# Altium PCB YL203纯密码板2084.PcbDoc
Units mil, origin at the board's own origin, x right, y up, seen from the top; angles counter-clockwise.
Board outline 2775 x 2250 mil, 2 copper layers (Top Layer, Bottom Layer); 85 components, 67 nets, 269 pads, 213 vias.
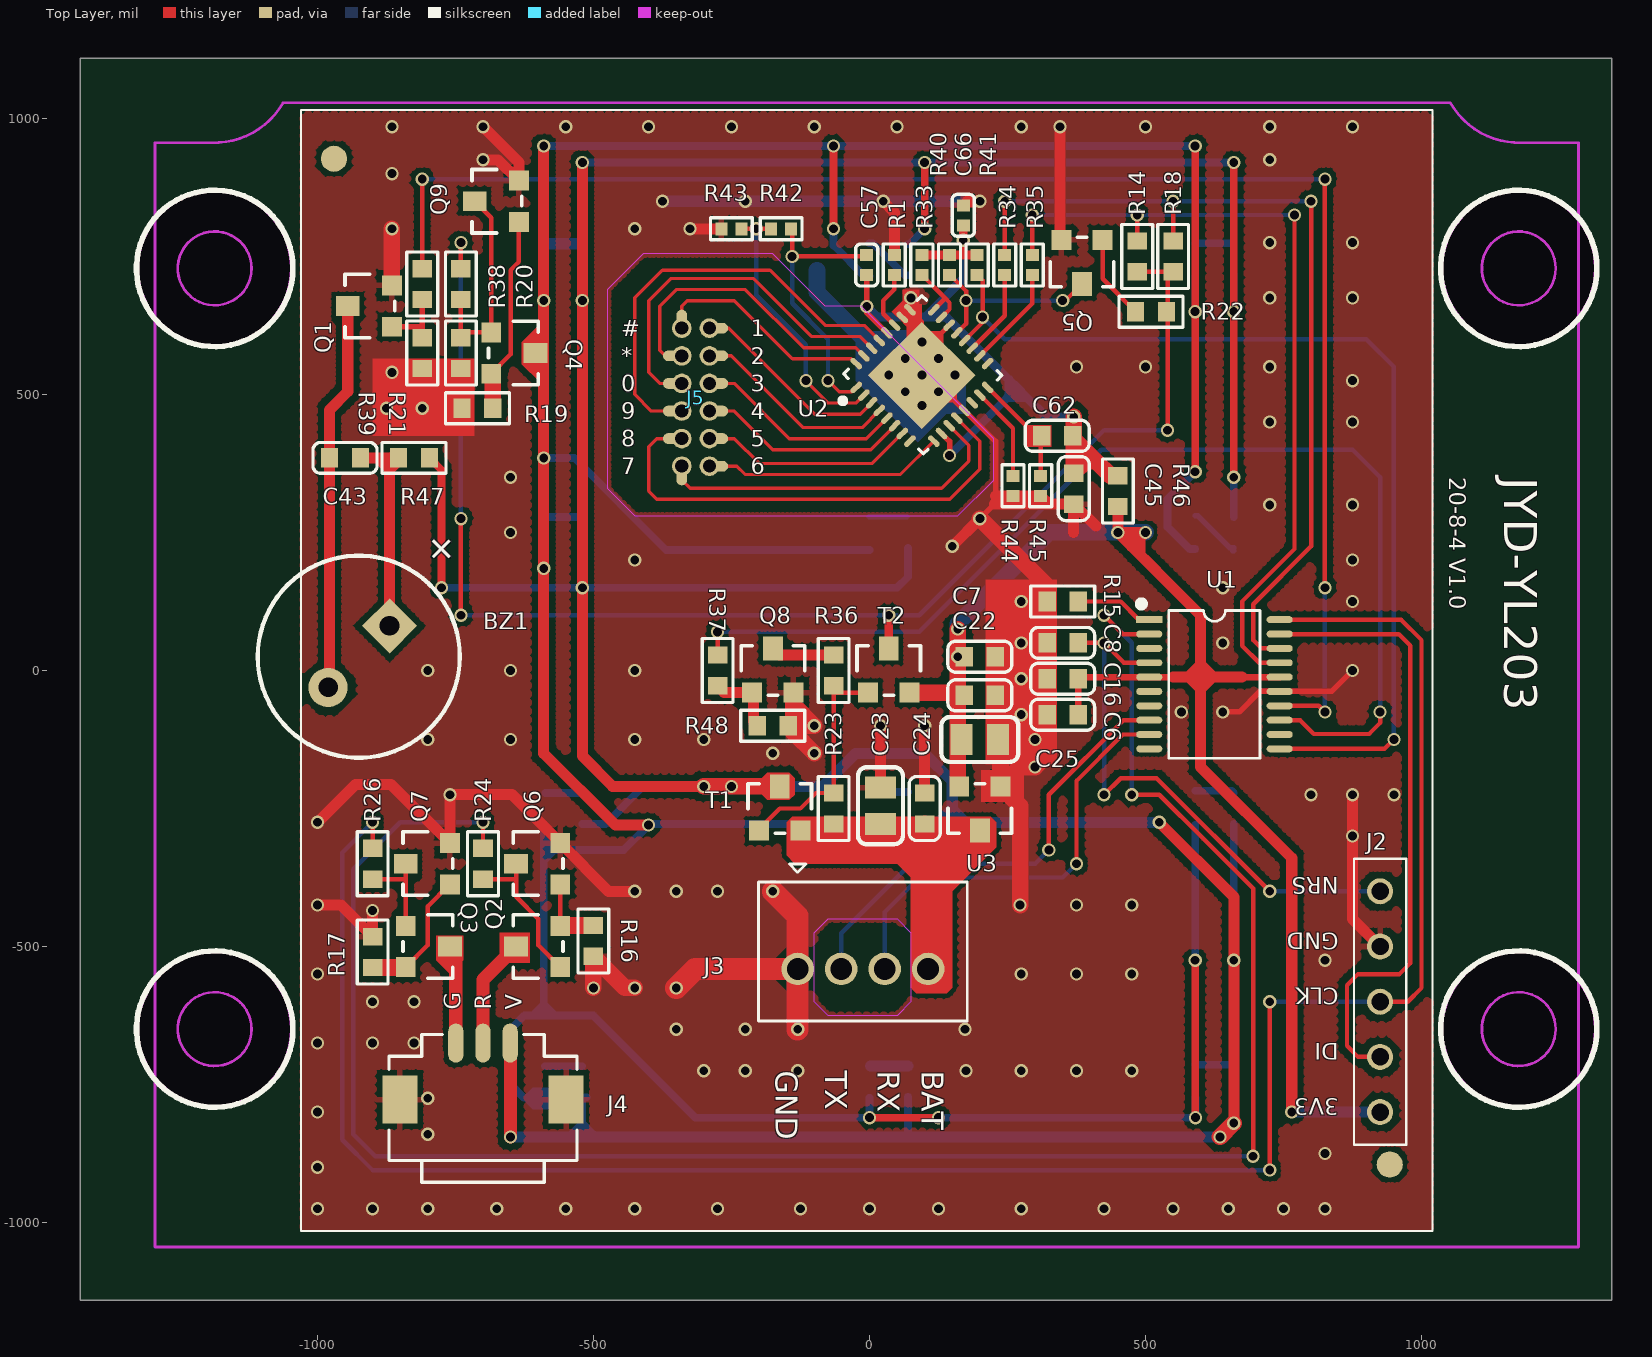
[diagram p0: Top Layer view]
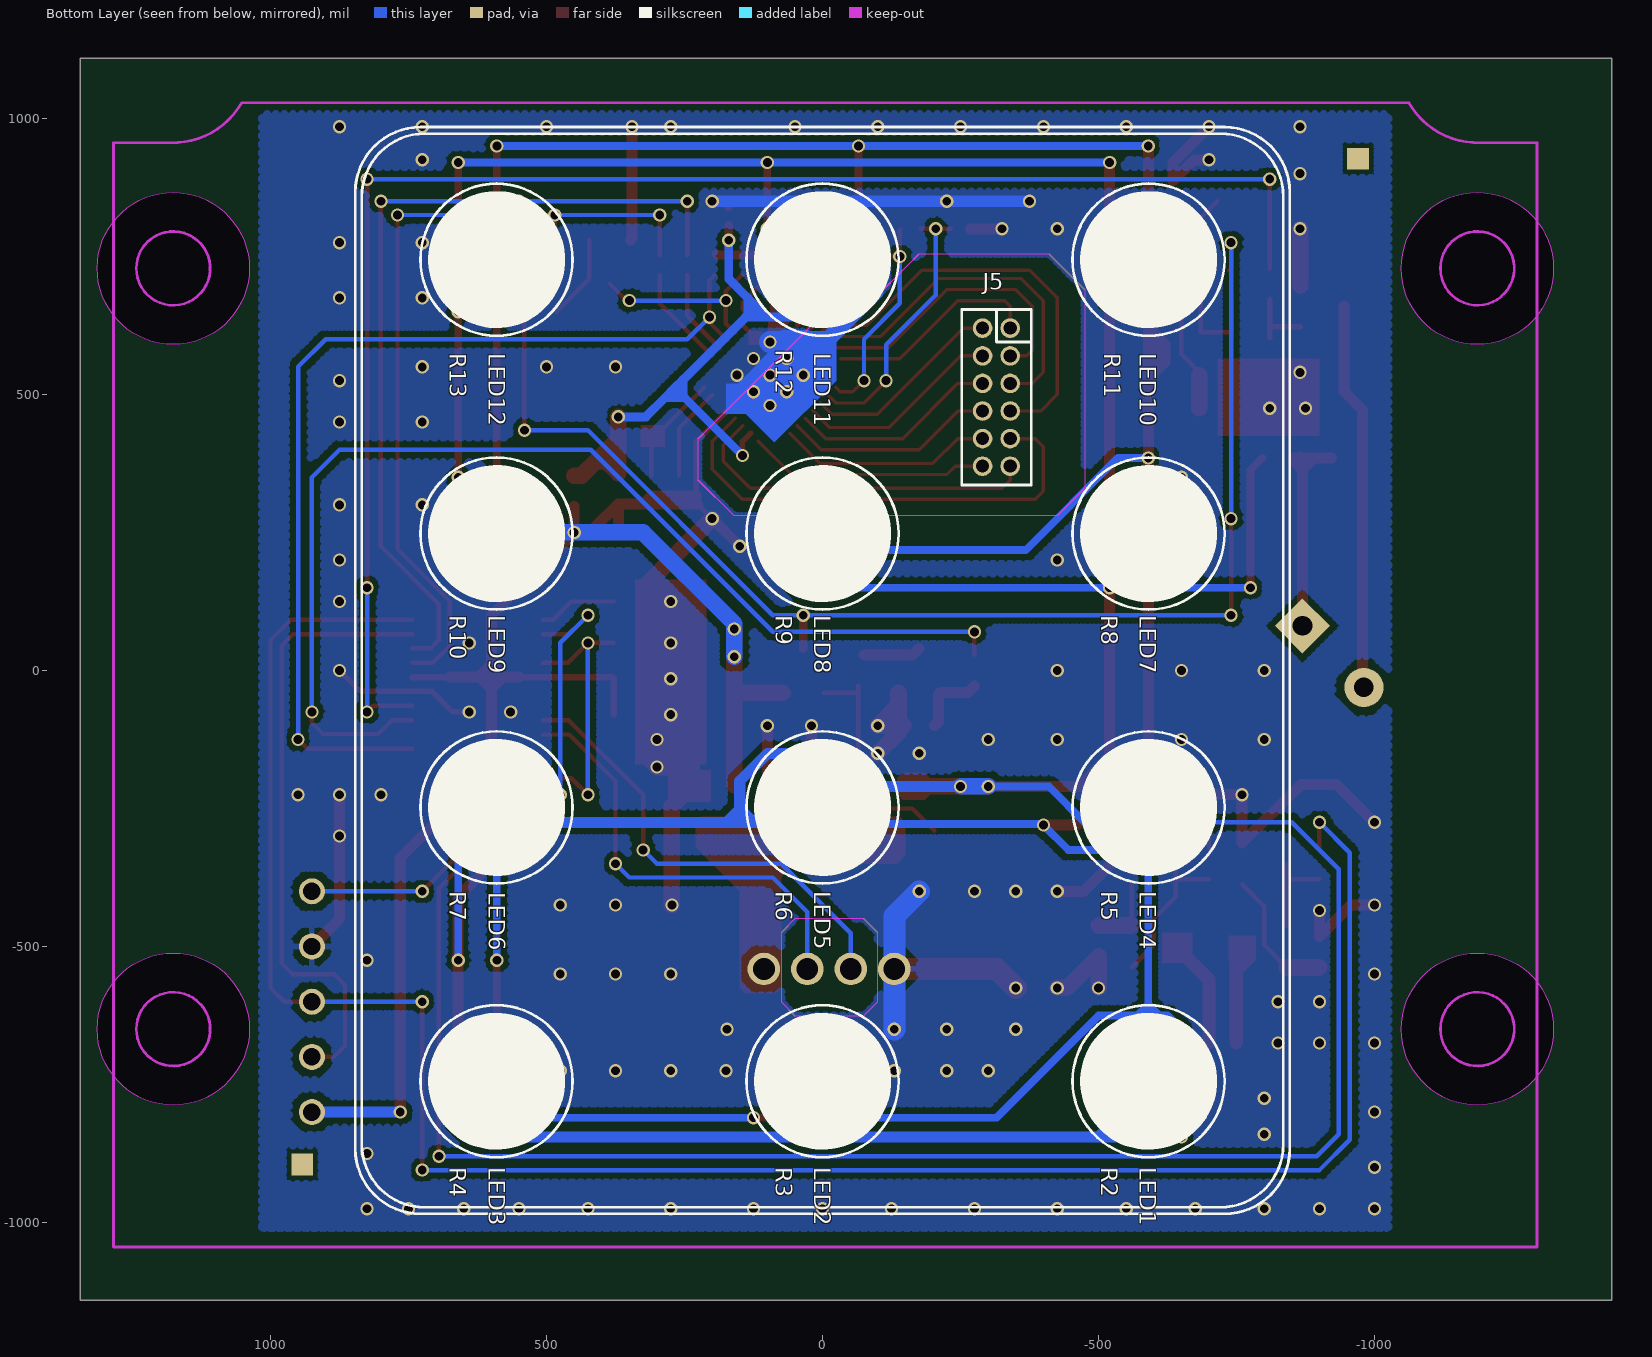
[diagram p1: Bottom Layer view, seen from below]
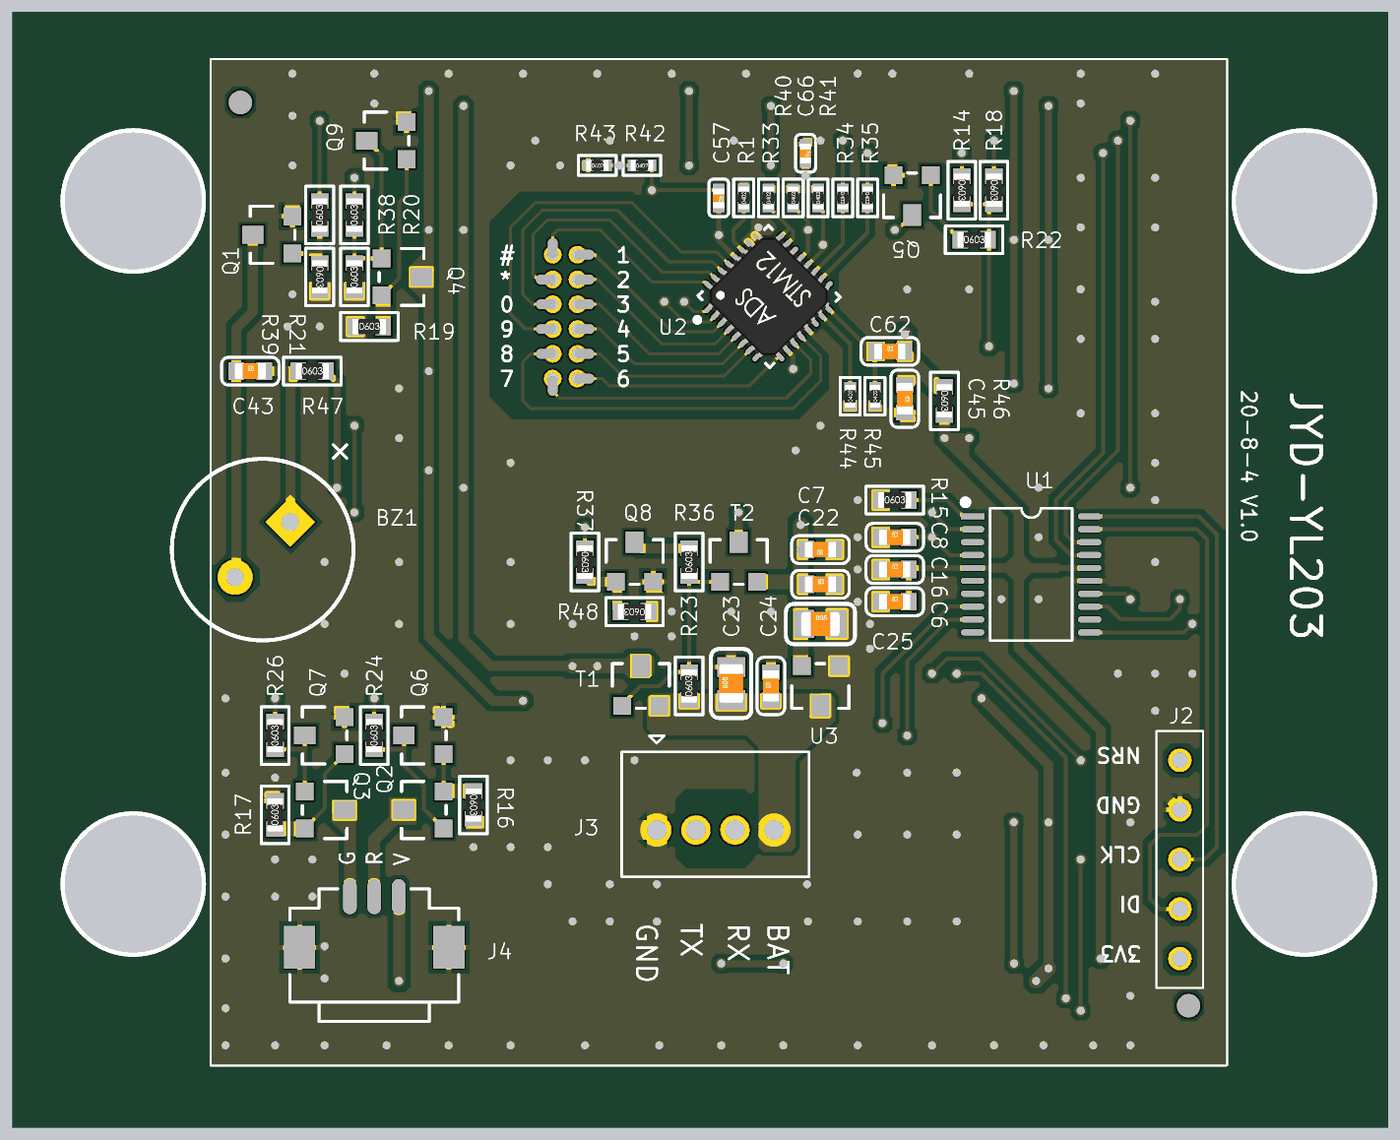
[diagram p2: 3D render of the assembled board from above, using the file's embedded part models]
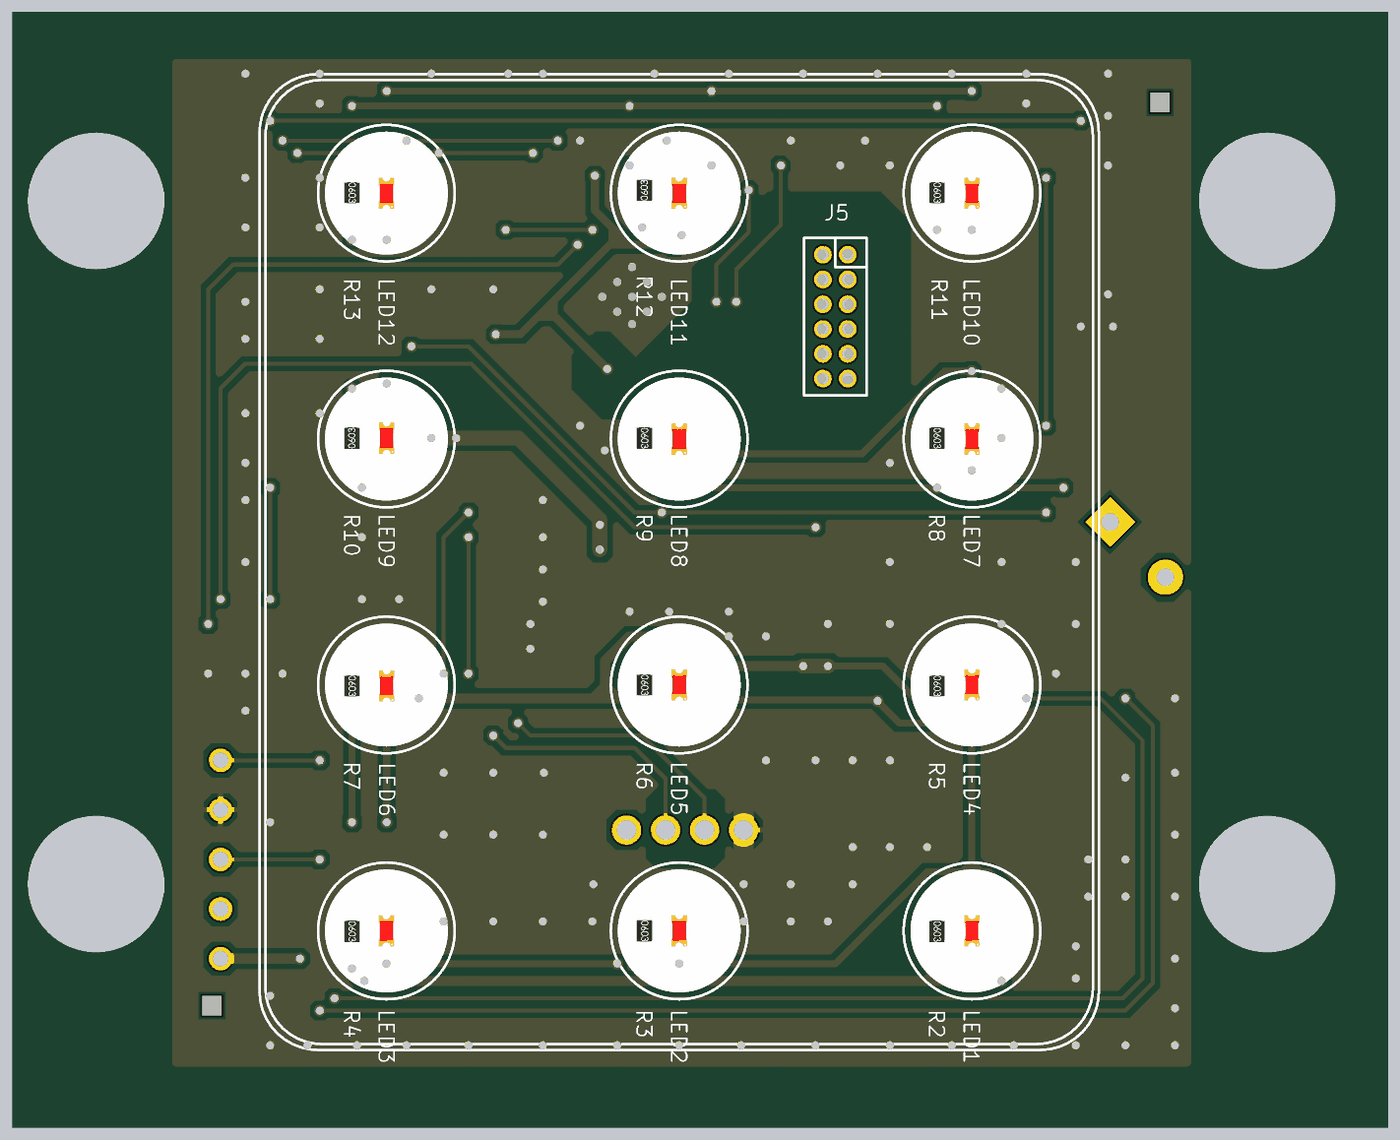
[diagram p3: 3D render of the assembled board from below, using the file's embedded part models]

## Layer stack, top to bottom
Top Layer: signal copper 1.4
Dielectric: dielectric 12.6, FR-4, Dk 4.8
Bottom Layer: signal copper 1.4

## Board outline
-1429.96,1109.41 1345.04,1109.41 1345.04,-1140.59 -1429.96,-1140.59 -1429.96,1109.41
cut-out: -1186.06,866.14 ccw(c-1186.06,728.35) -1323.86,728.35 ccw(c-1186.06,728.35) -1186.06,590.55 ccw(c-1186.06,728.35) -1048.27,728.35 ccw(c-1186.06,728.35)
cut-out: 1176.14,866.14 ccw(c1176.14,728.35) 1038.35,728.35 ccw(c1176.14,728.35) 1176.14,590.55 ccw(c1176.14,728.35) 1313.94,728.35 ccw(c1176.14,728.35)
cut-out: 1176.14,-511.81 ccw(c1176.14,-649.61) 1038.35,-649.61 ccw(c1176.14,-649.61) 1176.14,-787.4 ccw(c1176.14,-649.61) 1313.94,-649.61 ccw(c1176.14,-649.61)
cut-out: -1186.06,-511.81 ccw(c-1186.06,-649.61) -1323.86,-649.61 ccw(c-1186.06,-649.61) -1186.06,-787.4 ccw(c-1186.06,-649.61) -1048.27,-649.61 ccw(c-1186.06,-649.61)

## Design rules (kind name [scope] priority, off if disabled: settings)
Clearance Clearance_1 [(IsWire)or(IsThruPin)or(IsFill)or(InPolygon)or(IsKeepOut) vs (IsWire)or(IsThruPin)or(IsFill)or(InPolygon)or(IsKeepOut)] p1 off: gap=11
Clearance [All] p2: gap=7.87
ComponentClearance [All] p1: gap=0 collisioncheckmode=3 verticalgap=0 showdistances=FALSE
HoleSize [All] p1: absolutevalues=TRUE maxlimit=393.7 minlimit=1 maxpercent=80.000 minpercent=20.000
HoleToHoleClearance [All] p1: gap=0 allowstackedmicrovias=TRUE
MinimumSolderMaskSliver [All] p1: minsoldermaskwidth=0
PolygonConnect PolygonConnect_1 [IsVia] p1: connectstyle=Direct reliefconductorwidth=10 reliefentries=4 polygonreliefangle="90 Angle" airgapwidth=10
PolygonConnect [All] p2: connectstyle=Relief reliefconductorwidth=10 reliefentries=4 polygonreliefangle="90 Angle" airgapwidth=10
RoutingVias [All] p1: holewidth=28 width=50 viastyle="Through Hole" minholewidth=6 minwidth=8 maxholewidth=27.99 maxwidth=27.99
SilkToSilkClearance [All] p1: silktosilkclearance=0
SilkToSolderMaskClearance SilkscreenOverComponentPads [IsPad] p1: minsilkscreentomaskgap=0 clearancetoexposedcopper=TRUE
SolderMaskExpansion [All] p1: expansion=4
Width [All] p1: maxlimit=80 minlimit=3 preferedwidth=10
22 further rules are at their usual default settings.

## Components (designator, comment, footprint, x,y, rotation, side; value= is the part's Value field where it differs from the comment)
BZ1 "BUZZER" BUZZER_D93_L40 -925,25 r225 top
C6 "1uF/6.3V" LC-0603_C 350,-80 r0 top
C7 "100nF" LC-0603_C 200,25 r180 top
C8 "100nF" LC-0603_C 350,50 r0 top
C16 "1uF/6.3V" LC-0603_C 350,-15 r0 top
C22 "100nF" LC-0603_C 200,-45 r0 top
C23 "22uF/10V" LC-0805_C 20,-245 r90 top
C24 "100nF" LC-0603_C 100,-250 r90 top
C25 "10uF/10V" LC-0805_C 200,-125 r0 top
C43 "10uF/10V" LC-0603_C -950,385 r0 top
C45 "1uF" LC-0603_C 370.04,329.41 r270 top
C57 "820P 1%" LC-0402_C -4.96,734.41 r270 top
C62 "0.1uF" LC-0603_C 340,425 r0 top
C66 "0.1uF" LC-0402_C 170.04,824.41 r270 top
J2 "2.54mm烧录口" 5P-2.54mm 925,-800 r90 top
J3 "后板串口" 4P-2.0XX -129.96,-540.59 r0 top
J4 "S3B-PH-KL" 3P-1.25mm-SMT -700,-675 r0 top
J5 "Header 12H" 6P*2*1.27MM_1 -314.96,495 r270 bottom
LED1 "LED" 0603LED -590.55,-744.09 r270 bottom
LED2 "LED" 0603LED 0,-744.09 r270 bottom
LED3 "LED" 0603LED 590.55,-744.09 r270 bottom
LED4 "LED" 0603LED -590.55,-248.03 r270 bottom
LED5 "LED" 0603LED 0,-248.03 r270 bottom
LED6 "LED" 0603LED 590,-250 r270 bottom
LED7 "LED" 0603LED -590.55,248.03 r270 bottom
LED8 "LED" 0603LED 0,248.03 r270 bottom
LED9 "LED" 0603LED 590,250 r270 bottom
LED10 "LED" 0603LED -590.55,744.09 r270 bottom
LED11 "LED" 0603LED 0,744.09 r270 bottom
LED12 "LED" 0603LED 590.55,744.09 r270 bottom
Q1 "SS8050" SOT-23-3L -905,660 r90 top (schematic designator T1)
Q2 "SS8050" SOT-23-3L -600,-500 r90 top (schematic designator T4)
Q3 "SS8050" SOT-23-3L -800,-500 r270 top (schematic designator T6)
Q4 "SS8050" SOT-23-3L -645,575 r270 top
Q5 "PMBT3904" SOT-23-3L 385,740 r180 top
Q6 "SS8050" SOT-23-3L -600,-350 r90 top
Q7 "SS8050" SOT-23-3L -800,-350 r90 top
Q8 "PMBT3904" SOT-23-3L -175,0 r0 top
Q9 "SS8050" SOT-23-3L -675,850 r90 top
R1 "2M1%" LC-0402_R 45.04,734.41 r90 top
R2 "100R" LC-0603_R -520,-745 r270 bottom
R3 "100R" LC-0603_R 70,-744.09 r270 bottom
R4 "100R" LC-0603_R 660,-745 r270 bottom
R5 "100R" LC-0603_R -520,-250 r270 bottom
R6 "100R" LC-0603_R 70,-248.03 r270 bottom
R7 "100R" LC-0603_R 660,-250 r270 bottom
R8 "100R" LC-0603_R -520,250 r270 bottom
R9 "100R" LC-0603_R 70,250 r270 bottom
R10 "100R" LC-0603_R 660,250 r90 bottom
R11 "100R" LC-0603_R -520,745 r270 bottom
R12 "100R" LC-0603_R 70,750 r90 bottom
R13 "100R" LC-0603_R 660,745 r270 bottom
R14 "10K" LC-0603_R 485,750 r270 top
R15 "10K" LC-0603_R 350,125 r0 top
R16 "33R" LC-0603_R -500,-490 r270 top
R17 "33R" LC-0603_R -900,-510 r90 top
R18 "10K" LC-0603_R 550,750 r270 top
R19 "33R" LC-0603_R -710,475 r0 top
R20 "1K" LC-0603_R -740,700 r90 top
R21 "10K" LC-0603_R -740,575 r90 top
R22 "10K" LC-0603_R 510,650 r0 top
R23 "100K" LC-0603_R -65,-250 r90 top
R24 "10K" LC-0603_R -700,-350 r90 top
R26 "10K" LC-0603_R -900,-350 r90 top
R33 "10K" LC-0402_R 95.04,734.41 r90 top
R34 "10R" LC-0402_R 245.04,734.41 r270 top
R35 "10R" LC-0402_R 295.04,734.41 r270 top
R36 "1K" LC-0603_R -65,0 r90 top
R37 "1K" LC-0603_R -275,0 r270 top
R38 "1K" LC-0603_R -810,700 r90 top
R39 "10K" LC-0603_R -810,575 r270 top
R40 "10K" LC-0402_R 145.04,734.41 r90 top
R41 "10K" LC-0402_R 195.04,734.41 r90 top
R42 "510K1%" LC-0402_R -160,800 r0 top
R43 "2M1%" LC-0402_R -250,800 r0 top
R44 "36K 1%" LC-0402_R 260.04,334.41 r90 top
R45 "330K" LC-0402_R 310.04,334.41 r90 top
R46 "0R-空" LC-0603_R 450,325 r270 top
R47 "2R2" LC-0603_R -825,385 r0 top
R48 "100K" LC-0603_R -175,-100 r180 top
T1 "SI2301" "SOT-23 - GDS" -162.4,-250 r0 top (schematic designator Q2)
T2 "SI2301" "SOT-23 - GDS" 35,0 r0 top (schematic designator Q1)
U1 "STM32F030F4P6" TSSOP-20-0.66 625,-25 r0 top
U2 "TSM12M" ADS_TMS12 95.04,534.41 r45 top
U3 "HT7533" SOT-23-3L 200,-250 r180 top

## Footprints (in the part's own frame and the unit in brackets; to place one, negate y for a bottom-side part, rotate by r counter-clockwise, add the part's x,y. Pads: shape width x height; smd on the part's side, far side on the other; paste and mask are expansions set on the pad)
3P-1.25mm-SMT [mm]
  oval 0.7x1.8 smd mask+0.05: 1(-1.25,0) 2(0,0) 3(1.25,0)
  rect 1.6x2.2 smd mask+0.05: 4(-3.825,-2.6) 5(3.825,-2.6)
  silkscreen extent -4.33,-6.4 4.33,0.4
4P-2.0XX [mm]
  round 1.5 hole 1: 1(0,0) 2(2,0) 3(4,0) 4(6,0)
  silkscreen extent -1.8,-2.4 7.8,4.83
5P-2.54mm [mm]
  round 1.2 hole 0.8: 1(0,0) 2(2.54,0) 3(5.08,0) 4(7.62,0) 5(10.16,0)
  silkscreen extent -1.5,-1.2 11.66,1.2
6P*2*1.27MM_1 [mm]
  oval 1x0.5 smd far side: 1(-3.527,0.635) 11(3.556,0.635)
  round 0.9 hole 0.6 paste+1: 1(-3.175,0.635)
  oval 0.5x1 smd far side: 2(-3.175,-1) 3(-1.905,1) 4(-1.905,-1) 5(-0.635,1) 6(-0.635,-1) 7(0.635,1) 8(0.635,-1) 9(1.905,1) 10(1.905,-1) 12(3.175,-1)
  round 0.9 hole 0.6 paste+0: 2(-3.175,-0.635) 3(-1.905,0.635) 4(-1.905,-0.635) 5(-0.635,0.635) 6(-0.635,-0.635) 7(0.635,0.635) 8(0.635,-0.635) 9(1.905,0.635) 10(1.905,-0.635) 11(3.175,0.635) 12(3.175,-0.635)
  silkscreen extent -4.04,-1.6 4.04,1.6
0603LED [mil]
  rect 34x34 smd: 1(-30,0) 2(30,0)
  silkscreen extent -60,-30 72,30, body extent -31,-16 31,16, height 24
ADS_TMS12 [mm]
  oval 0.65x0.25 smd: 1(-2.525,1.75) 2(-2.525,1.25) 3(-2.525,0.75) 4(-2.525,0.25) 5(-2.525,-0.25) 6(-2.525,-0.75) 7(-2.525,-1.25) 8(-2.525,-1.75) 17(2.525,-1.75) 18(2.525,-1.25) 19(2.525,-0.75) 20(2.525,-0.25) 21(2.525,0.25) 22(2.525,0.75) 23(2.525,1.25) 24(2.525,1.75)
  oval 0.25x0.65 smd: 9(-1.75,-2.525) 10(-1.25,-2.525) 11(-0.75,-2.525) 12(-0.25,-2.525) 13(0.25,-2.525) 14(0.75,-2.525) 15(1.25,-2.525) 16(1.75,-2.525) 25(1.75,2.525) 26(1.25,2.525) 27(0.75,2.525) 28(0.25,2.525) 29(-0.25,2.525) 30(-0.75,2.525) 31(-1.25,2.525) 32(-1.75,2.525)
  rect 3.5x3.5 smd: 33(0,0)
  silkscreen extent -3.52,-2.6 2.6,2.6, body extent -4.39,-4.41 4.46,4.44, height 0.9
BUZZER_D93_L40 [mm]
  rect 1.8x1.8 hole 0.9: 1(-2,0)
  round 1.8 hole 0.9: 2(2,0)
  silkscreen extent -4.65,-4.65 4.65,4.65
LC-0402_C [mm]
  rect 0.55x0.6 smd mask+0.051: 1(-0.457,0) 2(0.457,0)
  silkscreen extent -0.97,-0.51 0.97,0.51, body extent -0.48,-0.3 0.52,0.3, height 0.2
LC-0402_R [mm]
  rect 0.55x0.6 smd mask+0.051: 1(-0.457,0) 2(0.457,0)
  silkscreen extent -0.97,-0.51 0.97,0.51, body extent -0.57,-0.27 0.58,0.28, height 0.41
LC-0603_C [mm]
  rect 0.8x0.9 smd: 1(-0.711,0) 2(0.711,0)
  silkscreen extent -1.47,-0.71 1.47,0.71, body extent -0.8,-0.4 0.8,0.4, height 0.3
LC-0603_R [mm]
  rect 0.8x0.9 smd: 1(-0.711,0) 2(0.711,0)
  silkscreen extent -1.47,-0.71 1.47,0.71, body extent -0.85,-0.4 0.85,0.4, height 0.56
LC-0805_C [mil]
  rect 40x56 smd: 1(-33,0) 2(33,0)
  silkscreen extent -70,-41 70,41, body extent -39,-25 39,25, height 30
"SOT-23 - GDS" [mil]
  rect 36x43.31 smd: D(0,40)
  rect 36x36 smd: G(-37.4,-40) S(37.4,-40)
  silkscreen extent -57,-45 58,45
SOT-23-3L [mil]
  rect 36x36 smd: 1(-37.4,-40) 2(37.4,-40)
  rect 36x43.31 smd: 3(0,40)
  silkscreen extent -57,-45 58,45
TSSOP-20-0.66 [mm]
  rect 1.2x0.32 smd mask+0.051: 1(-3,2.972)
  oval 1.2x0.32 smd mask+0.051: 2(-3,2.311) 3(-3,1.651) 4(-3,0.991) 5(-3,0.33) 6(-3,-0.33) 7(-3,-0.991) 8(-3,-1.651) 9(-3,-2.311) 10(-3,-2.972) 11(3,-2.972) 12(3,-2.311) 13(3,-1.651) 14(3,-0.991) 15(3,-0.33) 16(3,0.33) 17(3,0.991) 18(3,1.651) 19(3,2.311) 20(3,2.972)
  silkscreen extent -3.51,-3.4 2.1,3.85

## Part data
BZ1: "Buzzer"
C6 C7 C8 C16: library part "CAP NP"
C22 C24: library part CAP-NP, "Capacitor, Ceramic"
C23 C25: library part CAP-P, "Capacitor, tolerance ±20%"
C43: library part C_0_Dup1
C45: library part C-C?, "Electrolytic Capacitor"
C57 C62 C66: library part CAP, "Capacitor"
J2: library part "Header 5", "Header, 5-Pin"
J3: library part "Header 4H", "Header, 4-Pin, Right Angle"
J4: library part "Header 3", "Header, 3-Pin"
J5: "Header, 12-Pin, Right Angle"
Q1 Q2 Q3 Q4 Q5 Q6 Q7 Q8 Q9: library part NPN_BJT, "Bipolar Junction Transistor"
R1 R22 R33 R40 R41 R42 R43 R44 R45: library part RES2
R2 R3 R4 R5 R6 R7 R8 R9 R10 R11 R12 R13 R14 R16 R17 R18 R19 R20 R21 R23 R36 R37 R47 R48: library part R
R15 R34 R35 R38 R39: library part R_Dup1
R24 R26: library part RES
R46: library part POWER-R
T1 T2: library part PWRMOSFET_EP_DGS_0
U1: library part Component_1
U3: library part XC6206P302M

## Free pads (board coordinates)
  round 39.37 hole 133.86: 1(-1186.06,-649.61) 2(-1186.06,728.35) 3(1176.14,-649.61) 4(1176.14,728.35)
  round 47.24 smd: MARK1(-970,927) MARK2(942.51,-895)
  rect 39.37x39.37 smd far side: MARK3(-970,927) MARK4(942.51,-895)

## Via types
v1: diameter 24, hole 16, Top Layer to Bottom Layer, tented both sides, 213 vias

## Nets (pads, with @x,y where several pads share a name; then routed paths per layer and width w, separated by ;. In a path a pad name is that pad's centre, name@x,y a point inside that pad or via, vN(x,y) a via of type N, cw(c..) or ccw(c..) an arc to the next point about the centre after c; other vN are vias at no path point)
BACKING_RED: R24.2 U1.2 | length 3660.9
  Top Layer w8: R24.2 v1(-700,-275) ; v1(425,100) 459,66 U1.2 ; v1(475,-225) 525,-225 605,-305 695,-395 v1(695,-880)
  Bottom Layer w8: v1(-700,-275) -850,-275 -935,-360 -935,-840 -895,-880 v1(695,-880) ; v1(425,100) 475,50 v1(475,-225)
BUZZER: R38.2 U1.14 | length 2848.4
  Top Layer w8: R38.2 v1(-810,890) ; U1.14 814,-64 v1(825,-75) ; v1(825,150) v1(825,890)
  Bottom Layer w8: v1(-810,890) v1(825,890) ; v1(825,-75) v1(825,150)
GND: C6.1 C7.1 C8.1 C16.1 C22.2 C23.2 C24.2 C25.2 C45.2 C66.1 J2.4 J3.1 J4.4 J4.5 Q1.2 Q5.2 Q6.2 Q7.2 Q8.2 Q9.2 R1.2 R15.1 R16.2 R17.2 R19.1 R21.1 R39.2 R43.1 R44.1 R45.1 R48.1 U1.15 U2.13 U2.22 U2.25 U2.26 U2.33 U3.1 | length 7373.8
  Top Layer w8: U2.26 U2.33@95.04,604.01 ; U2.25 95.04,631.85 U2.33@95.04,604.01 ; U2.33 U2.33@95.04,576.17 ; U2.22 U2.33@95.04,576.17 ; U2.33@95.04,576.17 U2.33@95.04,604.01
  Top Layer w10: U2.33 108.96,534.41 U2.13 228.53,414.84 228.53,316.41 228.53,303.53 226.41,301.41 v1(200,275) ; v1(640,-75) 670,-75 707,-38 U1.15 837,-38 v1(875,0)
  Top Layer w20: v1(-1000,-425) -957,-425 R17.2 v1(-900,-435) ; v1(-1000,-275) -931.28,-206.28 -866.32,-206.28 Q7.2 v1(-760,-225) -647.6,-225 Q6.2 -472.6,-400 v1(-425,-400) ; v1(-700,925) -672.6,925 Q9.2 -635,920 v1(-700,985) ; v1(-325,800) R43.1 ; C23.2 v1(20,-100) ; v1(25,850) 45.04,829.96 R1.2 ; C24.2 v1(100,-100) ; v1(150,225) v1(200,275) ; C66.1 177.63,850 v1(200,850) ; 226.41,301.41 325.04,301.41 ; 228.53,316.41 R44.1 R45.1 325.04,301.41 ; v1(345,985) 345,782.6 Q5.2 ; 370.04,250.04 C45.2 ; 410,261.45 C45.2 ; v1(875,-225) 875,-450 J2.4 ; 325.04,301.41 C45.2
  Top Layer w30: v1(-865,540) R39.2@-810,540 ; Q1.2 v1(-865,800) ; R39.2 R39.2@-810,540 ; R21.1 -740,477 R19.1 v1(-810,475) R39.2@-810,540 ; v1(-500,-575) R16.2 -443,-575 v1(-425,-575) ; R48.1 R48.1@-137.6,-100 ; Q8.2 -137.6,-62.4 ; v1(-100,-150) -137.6,-112.4 R48.1@-137.6,-100 ; v1(200,275) 322,153 R15.1 ; C22.2 C22.2@237.4,-45 ; C7.1 C7.1@237.4,25 ; C25.2 C25.2@237.4,-125 ; v1(272.9,-425) 272.9,-245.5 U3.1 ; v1(275,-80) C6.1 ; v1(300,-125) C25.2@237.4,-125 ; R48.1@-137.6,-100 -137.6,-62.4 ; R48.1@-137.6,-100 v1(-100,-100) -137.6,-62.4 ; U3.1 272.4,-175 v1(300,-175) 322,-153 C6.1 ; U3.1 C25.2@237.4,-125 ; C25.2@237.4,-125 C22.2@237.4,-45 ; C22.2@237.4,-45 245,-45 v1(275,-15) C16.1 ; C22.2@237.4,-45 C7.1@237.4,25 ; C7.1@237.4,25 250,25 v1(275,50) C8.1 ; C7.1@237.4,25 237.4,87.4 v1(275,125) R15.1 ; C6.1 C16.1 ; C16.1 C8.1 ; C8.1 R15.1
  Top Layer w40: v1(-350,-575) -315.59,-540.59 J3.1 ; v1(-175,-400) -129.96,-445.04 J3.1 ; v1(-129.96,-649.96) J3.1
  Bottom Layer w20: v1(-375,850) v1(-225,850) v1(25,850) v1(200,850)
  Bottom Layer w30: -95,725 -95,685 -5,595
  Bottom Layer w40: v1(-175,-400) -129.96,-445.04 J3.1 v1(-129.96,-649.96) v1@-130,-650 ; v1(35,535) 35,555 -5,595 v1(95,595)
  other v1: -1000,-975 -900,-975 -800,-975 -675,-975 -550,-975 -425,-975 -275,-975 -125,-975 0,-975 125,-975 275,-975 425,-975 550,-975 650,-975 750,-975 825,-975 -1000,-900 825,-875 -800,-840 -1000,-800 -800,-775 -300,-725 -225,-725 -130,-725 175,-725 275,-725 375,-725 475,-725 -1000,-675 -900,-675 -825,-675 -350,-650 -225,-650 173.02,-650 -900,-600 -825,-600 -1000,-550 275,-550 375,-550 475,-550 825,-525 375,-425 475,-425 -350,-400 -275,-400 875,-300 800,-225 950,-225 -175,-150 -800,-125 -650,-125 -425,-125 -300,-125 565,-75 -800,0 -650,0 -425,0 640,50 875,125 640,150 -425,200 875,200 -650,250 725,300 875,300 -650,350 725,450 875,450 -875,475 95,480 65,505 125,505 875,525 95,535 155,535 375,550 500,550 725,550 65,565 125,565 75,675 725,675 875,675 725,775 875,775 -425,800 -865,900 725,925 -865,985 -550,985 -400,985 -250,985 -100,985 50,985 275,985 500,985 725,985 875,985
GREEN_LL: J4.1 Q3.3 | length 179.5
  Top Layer w20: Q3.3 Q3.3@-749.21,-510.79
  Top Layer w24: J4.1 Q3.3@-749.21,-510.79
IRQ_TSM12: R41.1 U1.11 U2.20 | length 1807.6
  Top Layer w8: U2.20 205,630.45 v1(205,640) 205,706.45 R41.1 ; U1.11 933,-142 v1(950,-125)
  Bottom Layer w8: v1(205,640) 245,600 900,600 950,550 v1(950,-125)
KEY0: J5.5 U2.30 | length 656.6
  Top Layer w6: J5.5@-354.37,520 -380,520 -400,540 -400,670 -360,710 -210,710 -105,605 -17.31,605 U2.30
KEY1: J5.2 U2.3 | length 352.5
  Top Layer w6: J5.2@-275.63,620 -255,620 -99.41,464.41 -16.72,464.41 U2.3
KEY2: J5.4 U2.4 | length 360.1
  Top Layer w6: J5.4@-275.63,570 -250,570 -120,440 -13.29,440 U2.4
KEY3: J5.6 U2.5 | length 364.1
  Top Layer w6: J5.6@-275.63,520 -245,520 -145,420 -5.45,420 U2.5
KEY4: J5.8 U2.6 | length 368.2
  Top Layer w6: J5.8@-275.63,470 -245,470 -175,400 2.39,400 U2.6
KEY5: J5.10 U2.7 | length 376.3
  Top Layer w6: J5.10@-275.63,420 -245,420 -200,375 5.23,375 U2.7
KEY6: J5.12 U2.9 | length 423.5
  Top Layer w6: J5.12@-275.63,370 -240,370 -225,355 56.22,355 U2.9
KEY7: J5.11 U2.11 | length 635.3
  Top Layer w6: J5.11@-340,355 -340,345 -325,330 130.63,330 180.04,379.41 180.04,407.65 U2.11
KEY8: J5.9 U2.12 | length 870.6
  Top Layer w6: J5.9@-354.37,420 -385,420 -400,405 -400,325 -385,310 145.63,310 200.04,364.41 200.04,415.49 U2.12
KEY9: J5.7 U2.29 | length 774.3
  Top Layer w6: J5.7@-354.37,470 -395,470 -425,500 -425,675 -375,725 -180,725 -80,625 -9.47,625 U2.29
KEY#: J5.1 U2.32 | length 381.6
  Top Layer w6: J5.1@-340,633.86 -340,660 -330,670 -245,670 -139.41,564.41 U2.32@-32.4,564.41
KEY*: J5.3 U2.31 | length 541.9
  Top Layer w6: J5.3@-354.37,570 -370,570 -380,580 -380,660 -350,690 -225,690 -119.41,584.41 -24.56,584.41 U2.31
M3V3: C6.2 C7.2 C16.2 C22.1 C25.1 J2.1 R46.2 T2.S U1.5 U1.16 U3.2 | length 2875.3
  Top Layer w12: C6.2 C16.2 381,-12 U1.5 550,-12 ; 675,-12 U1.16
  Top Layer w20: R46.2 v1(450,250) ; 490,210 490,240 v1(500,250) ; 520,180 475,225 ; 550,-12 600,-12 ; 675,-12 600,-12 ; v1(765,-800) 765,-340 600,-175 600,-12 ; v1(450,250) 475,250 ; v1(450,250) 475,225 ; 475,225 475,250 ; 475,225 v1(500,250) ; 475,225 600,100 600,-12 ; 475,250 v1(500,250)
  Top Layer w30: T2.S C22.1@160,-40 ; U3.2@160,-207.4 C22.1@160,-40 ; v1(160,75) v1(160,25) C22.1@160,-40
  Bottom Layer w20: v1(765,-800) J2.1
  Bottom Layer w30: v1(160,25) 160,85 325,250 v1(450,250) v1(500,250)
NetBZ1_1: BZ1.1 C43.2 R47.1 | length 373.3
  Top Layer w20: C43.2 -869.32,385 ; BZ1.1 -869.32,385 ; R47.1 -869.32,385
NetBZ1_2: BZ1.2 C43.1 Q1.3 | length 705.5
  Top Layer w20: BZ1.2 -978,-28 -978,97 C43.1 -978,472 -945,505 Q1.3
NetC57_1: C57.1 R42.2 U2.1 | length 501.3
  Top Layer w6: R42.2 R42.2@-140,798 ; v1(-75,525) -55,505 -31.81,505 U2.1 ; C57.1@-7.37,750 C57.1
  Top Layer w8: R42.2@-140,798 v1(-140,750) C57.1@-7.37,750
  Bottom Layer w8: v1(-140,750) -140,665 -75,600 v1(-75,525)
NetC62_1: C62.1 R45.2 U2.16 | length 200.2
  Top Layer w8: U2.16 310.04,416.85 R45.2
NetLED1_1: LED1.1 R2.1 | length 68
  Bottom Layer w14: LED1.1@-588,-717 R2.1
NetLED1_2: LED1.2 LED2.2 LED3.2 LED4.2 LED5.2 LED6.2 LED7.2 LED8.2 LED9.2 LED10.2 LED11.2 LED12.2 Q4.3 | length 7556
  Top Layer w14: v1(-64.96,800) v1@-64.96,950 ; v1(0,-810) v1(125,-810) ; v1(590,-525) 590,-809.45 v1(590.55,-810) ; v1(590,360) v1(590,650) v1(590,950)
  Top Layer w20: v1(-590,950) v1(-590,670) v1(-590,385) v1(-590,185) -590,-150 -460,-280 v1(-400,-280)
  Bottom Layer w14: LED1.2 -625.91,-774.09 -650,-750 -650,-650 -625,-625 -610,-625 ; LED10.2 -590.55,670.55 v1(-590,670) ; LED4.2@-590,-278.58 -590,-305 ; v1(-590,185) LED7.2@-590,217.48 ; v1(-590,385) -535,385 -368.03,218.03 LED8.2 ; v1(-590,950) v1(-65,950) v1(590,950) ; -550,-625 -570,-625 ; v1(-400,-280) -445,-325 -570,-325 ; v1@-400,-278.03 LED5.2 ; v1(-64.96,800) -64.96,769.96 -9.09,714.09 LED11.2 ; LED2.2 v1(0,-810) -315,-810 -500,-625 -570,-625 ; v1(125,-810) v1(590.55,-810) LED3.2 ; v1(590,-525) LED6.2 ; LED9.2 580,220 540,260 540,310 v1(590,360) ; v1(590,650) LED12.2@590,713.54 ; -610,-625 -590,-605 ; -610,-625 -590,-625 ; -590,-625 -570,-625 ; -590,-625 -590,-605 ; -590,-605 -590,-345 ; -590,-605 -570,-625 ; -590,-345 -590,-325 ; -590,-345 -570,-325 ; -590,-325 -590,-305 ; -590,-325 -570,-325 ; -590,-305 -570,-325
NetLED2_1: LED2.1 R3.1 | length 68
  Bottom Layer w20: LED2.1@2,-716.09 R3.1
NetLED3_1: LED3.1 R4.1 | length 70.7
  Bottom Layer w14: LED3.1 657.09,-714.09 R4.1
NetLED4_1: LED4.1 R5.1 | length 66.6
  Bottom Layer w14: LED4.1@-586.58,-222 R5.1
NetLED5_1: LED5.1 R6.1 | length 68
  Bottom Layer w14: LED5.1@2,-220.03 R6.1
NetLED6_1: LED6.1 R7.1 | length 71.1
  Bottom Layer w14: LED6.1@590.55,-218.03 656.03,-218.03 R7.1
NetLED7_1: LED7.1 R8.1 | length 65.5
  Bottom Layer w14: LED7.1 R8.1@-525.03,278.03
NetLED8_1: LED8.1 R9.1 | length 68
  Bottom Layer w10: LED8.1 R9.1@68,278.03
NetLED9_1: LED9.1 R10.1 | length 96
  Bottom Layer w10: LED9.1 595,280 653,222 R10.1 ; R10.1@658,217 R10.1@660,217
NetLED10_1: LED10.1 R11.1 | length 69.5
  Bottom Layer w20: LED10.1@-589.46,773 R11.1
NetLED11_1: LED11.1 R12.1 | length 94
  Bottom Layer w14: LED11.1 5.91,774.09 63.91,716.09 R12.1@70,716.09
NetLED12_1: LED12.1 R13.1 | length 68.4
  Bottom Layer w14: LED12.1 R13.1@658.91,774.09
NetQ1_1: Q1.1 R38.1 R39.1 | length 124
  Top Layer w10: Q1.1 -810,622.6 ; R39.1 -810,622.6 ; R38.1 -810,622.6
NetQ2_1: Q2.1 Q6.3 R24.1 | length 280.5
  Top Layer w8: R24.1 -640,-378 ; Q6.3 -640,-378 ; Q2.1 -600,-497.4 -600,-450 -640,-410 -640,-378
NetQ2_2: Q2.2 Q6.1 R16.1 | length 134.6
  Top Layer w8: Q2.2 Q6.1
  Top Layer w30: Q2.2@-559.4,-462 R16.1
NetQ3_1: Q3.1 Q7.3 R26.1 | length 172.6
  Top Layer w8: R26.1 -840,-378 ; Q3.1 -840,-378 ; Q7.3 -840,-378
NetQ3_2: Q3.2 Q7.1 R17.1 | length 242.5
  Top Layer w8: Q3.2 -800,-497.4 -800,-427.4 Q7.1
  Top Layer w30: R17.1 Q3.2@-840.6,-538
NetQ4_1: Q4.1 Q9.3 R20.1 R21.2 | length 374
  Top Layer w8: R21.2 R21.2@-740,612.4 ; R20.1 R21.2@-740,612.4 ; Q9.3 -685,820 Q4.1 R21.2@-740,612.4
NetQ4_2: Q4.2 Q9.1 R19.2 | length 355.3
  Top Layer w8: Q4.2 -650,572.6 -650,725 -635,740 Q9.1
  Top Layer w30: R19.2 Q4.2@-682,534.6
NetQ5_1: Q5.1 R22.1 | length 154.7
  Top Layer w8: Q5.1 422.4,709.6 R22.1
NetQ8_1: Q8.1 R37.2 R48.2 | length 131.5
  Top Layer w20: R37.2 -263,-40 Q8.1 -210,-42.4 -210,-93 R48.2
NetQ8_3: Q8.3 R36.2 | length 105
  Top Layer w20: Q8.3 -163,28 R36.2@-75,28
NetR1_1: R1.1 U2.27 | length 107.7
  Top Layer w8: R1.1 45.04,690.04 25,670 25,646.21 U2.27
NetR15_2: R15.2 U1.1 | length 142.6
  Top Layer w8: R15.2 455,125 488,92 U1.1
NetR23_2: R23.2 R36.1 T1.G T2.G | length 422.2
  Top Layer w8: T1.G@-202.4,-290 -162.4,-250 -125,-250 -97,-222 R23.2 R36.1@-65,-40 ; R36.1 R36.1@-65,-40 ; T2.G R36.1@-65,-40
NetR33_1: R33.1 U2.23 U2.24 | length 132.9
  Top Layer w8: R33.1 137.32,674.13 ; U2.24 137.32,674.13 ; U2.23 145,653.97 145,666.45 137.32,674.13
NetR34_2: R34.2 U2.19 | length 157
  Top Layer w8: U2.19 245.04,642.65 R34.2
NetR35_2: R35.2 U2.18 | length 185.8
  Top Layer w8: U2.18 295.04,664.81 R35.2
NetR42_1: R42.1 R43.2 U2.2 | length 494
  Top Layer w6: v1(-115,525) -74.41,484.41 -24.56,484.41 U2.2
  Top Layer w8: R43.2 v1(-205,800) R42.1
  Bottom Layer w8: v1(-205,800) -205,680 -115,590 v1(-115,525)
NetR44_2: R44.2 U2.15 | length 171.3
  Top Layer w8: U2.15 260.04,439.01 R44.2
NRST: C8.2 J2.5 U1.4 | length 1016.1
  Top Layer w8: C8.2 v1(425,50) 461,14 U1.4 ; v1(425,-225) 455,-195 520,-195 v1(725,-400)
  Bottom Layer w8: v1(425,-225) v1(425,50) ; v1(725,-400) J2.5
PWR_CTL: R37.1 U1.13 | length 2118.5
  Top Layer w8: R37.1@-277,30 R37.1 v1(-275,70) ; U1.13 780,-90 805,-115 905,-115 925,-95 v1(925,-75)
  Bottom Layer w8: v1(-275,70) 90,70 ; 140,120 90,70 ; v1(925,-75) 925,350 875,400 420,400 90,70
RED_LL: J4.2 Q2.3 | length 199.9
  Top Layer w24: J4.2 -700,-560 Q2.3
SCL: R14.1 R35.1 U1.17 | length 1494.9
  Top Layer w8: R35.1 295.04,824.96 v1(295,825) ; R14.1 v1(485,825) ; U1.17 706,14 675,45 675,125 770,220 v1(770,825)
  Bottom Layer w8: v1(295,825) v1(485,825) v1(770,825)
SDA: R18.1 R34.1 U1.18 | length 1617.4
  Top Layer w8: R34.1 v1@245.04,850 ; R18.1 v1(550,850) ; U1.18 710,40 695,55 695,120 800,225 v1(800,850)
  Bottom Layer w8: v1(245,850) v1(550,850) v1(800,850)
SWCLK/GREEN: J2.3 R26.2 U1.20 | length 3840.1
  Top Layer w8: R26.2 v1(-900,-275) ; v1(725,-905) v1(725,-600) ; U1.20 963,92 1000,55 1000,-575 975,-600 J2.3
  Bottom Layer w8: v1(-900,-275) -955,-330 -955,-850 -900,-905 v1(725,-905) ; v1(725,-600) J2.3
SWDIO: J2.2 U1.19 | length 1130.4
  Top Layer w8: U1.19 959,66 980,45 980,-530 960,-550 885,-550 865,-570 865,-680 885,-700 J2.2
TSM3V3: C45.1 C57.2 C62.2 C66.2 R33.2 R40.2 R41.2 R46.1 U2.10 U2.28 | length 1539.6
  Top Layer w10: C57.2 v1(-4.96,659.41) -4.96,648.33 U2.28 ; U2.10 145.04,414.81 v1(145.04,389.41)
  Top Layer w16: R33.2 R40.2 170.04,752.41 ; C66.2 170.04,752.41 ; R41.2@193.04,754.41 191.04,752.41 170.04,752.41
  Top Layer w20: C62.2@370,441.37 v1@370,460
  Top Layer w30: v1(370.04,459.41) C62.2@370.04,419.41 ; R46.1 436.45,353 410.04,379.41 ; 370.04,379.41 392.04,379.41 ; 370.04,379.41 C62.2@370.04,419.41 ; 370.04,379.41 C45.1 392.04,379.41 ; C62.2@370.04,419.41 410.04,379.41 ; 392.04,379.41 410.04,379.41
  Bottom Layer w16: v1(-4.96,659.41) 14.45,640 100.63,640 ; v1(145.04,389.41) 250.04,494.41 ; v1(170.04,779.41) 170.04,709.41 135.04,674.41 ; v1(370.04,459.41) 320.04,459.41 285.04,494.41 ; 100.63,640 120.04,659.41 ; 100.63,640 139.45,640 ; 120.04,659.41 135.04,674.41 ; 120.04,659.41 135.04,644.41 ; 135.04,644.41 139.45,640 ; 135.04,644.41 135.04,674.41 ; 139.45,640 252.54,526.91 ; 250.04,494.41 252.54,496.91 ; 250.04,494.41 285.04,494.41 ; 252.54,496.91 267.54,511.91 ; 252.54,496.91 252.54,526.91 ; 252.54,526.91 267.54,511.91 ; 267.54,511.91 285.04,494.41
TSM12_EN: Q5.3 R40.1 U2.21 | length 347.1
  Top Layer w8: R40.1 146.04,716.41 175,687.45 v1(175,670) 175,628.29 U2.21 ; v1(350,670) 355,670 Q5.3
  Bottom Layer w8: v1(175,670) v1(350,670)
UART_RX: J3.3 U1.9 | length 803.5
  Top Layer w8: v1(375,-350) 375,-200 459,-116 U1.9
  Bottom Layer w8: J3.3 27.52,-437.48 90,-375 350,-375 v1(375,-350)
UART_TX: J3.2 U1.8 | length 841
  Top Layer w8: v1(325,-325) 325,-225 460,-90 U1.8
  Bottom Layer w8: J3.2 -51.22,-476.22 75,-350 300,-350 v1(325,-325)
V6V: J4.3 R2.2 R3.2 R4.2 R5.2 R6.2 R7.2 R8.2 R9.2 R10.2 R11.2 R12.2 R13.2 R47.2 T1.D | length 8770.9
  Top Layer w14: R47.2 -775,363 v1(-775,150) ; v1(100,800) v1(100,920) ; v1(660,350) v1(660,650) v1(660,920)
  Top Layer w20: v1(-520,920) v1(-520,670) v1(-520,150) -520,-155 -465,-210 v1(-300,-210) ; v1(525,-275) 660,-410 v1(660,-525) v1(660,-820)
  Top Layer w24: v1(-650,-845) J4.3@-650,-675
  Top Layer w30: v1(-300,-210) v1(-250,-210) T1.D@-165,-210 ; v1(635,-845) v1(660,-820)
  Bottom Layer w14: v1(-775,150) v1(-520,150) ; R2.2 -520,-820 ; R5.2 -478,-278 -410,-210 v1(-300,-210) ; R8.2 v1(-520,150) ; v1(-520,920) v1(100,920) v1(660,920) ; R2.2@-515,-773 R2.2@-512,-773 ; 70,-845 R3.2 ; R9.2 70,170 50,150 v1(-520,150) ; R12.2@70,772.09 72.09,772.09 v1(100,800) ; R6.2@71.03,-275 R6.2 R6.2@73.97,-280 ; v1@660,-810 R4.2 ; v1(660,-525) R7.2 ; R10.2 v1(660,350) ; v1(660,650) R13.2 ; -520,-840 -520,-820 ; -520,-840 -500,-840 -520,-820 ; -520,-840 -540,-840 -520,-820
  Bottom Layer w20: v1(-650,-845) 70,-845 v1(635,-845) v1(660,-820) ; v1(-520,670) R11.2 ; v1(-250,-210) -85,-210 -25,-150 100,-150 150,-200 150,-250 ; R6.2@71.03,-275 125,-275 ; v1(525,-275) 173.97,-275 ; 125,-275 150,-250 ; 125,-275 150,-275 ; 150,-275 150,-251.03 ; 150,-275 173.97,-275 ; 150,-251.03 150,-250 ; 150,-251.03 173.97,-275
  Bottom Layer w30: v1(-300,-210) v1(-250,-210)
VBAT: C23.1 C24.1 J3.4 R23.1 T1.S U3.3 | length 596.5
  Top Layer w30: T1.S@-125,-292.6 -127.6,-290 C24.1@106.26,-290 ; C24.1 106.26,-284.26 C24.1@106.26,-290 ; J3.4 C24.1@106.26,-290 ; U3.3 C24.1@106.26,-290
VDD3V3: R14.2 R18.2 R20.2 R22.2 T2.D | length 2606.4
  Top Layer w8: v1(-740,100) v1(-740,275) ; v1(-740,775) R20.2 R20.2@-737,725 ; R14.2 R18.2 R18.2@540,712 ; R18.2@538,710 R18.2@540,712 ; v1(540,435) R18.2@540,712
  Top Layer w16: T2.D v1(35,100)
  Bottom Layer w8: v1(-740,100) v1(35,100) 90,100 ; v1(-740,275) v1(-740,775) ; 120,130 90,100 ; v1(540,435) 425,435 90,100
pads on no net: U1.3 U1.6 U1.7 U1.10 U1.12 U2.8 U2.14 U2.17

## Polygon pours and split planes (outlines as drawn)
GND on Top Layer "Top Layer-GND" (hatched 45Degree grid 11 track 15, remove dead copper, pour order 4): -1025,1035 1015,1035 1015,-1010 -1015,-1010 -1025,-1010 -1025,1035
GND on Bottom Layer "Bottom Layer-GND" (hatched 45Degree grid 11 track 15, remove dead copper, pour order 3): -1025,1035 1015,1035 1015,-1010 -1015,-1010 -1025,-1010 -1025,1035

## Keep-outs
Keep-Out Layer:
  circle w5: c-1186.06,-649.61 r66.93
  circle w5: c1176.15,-649.61 r66.93
  circle w5: c1176.15,728.35 r66.93
  circle w5: c-1186.06,728.35 r66.93
  pour cut-out: -100,-475 -75,-450 50,-450 75,-475 75,-600 50,-625 -75,-625 -100,-600
  pour cut-out: -425,280 160,280 225,345 225,420 -15,660 -80,660 -175,755 -410,755 -475,690 -475,330
  lines w5: -1178.56,956.23 -1294.33,956.14 -1294.33,-1044.33 1284.42,-1044.33 1284.42,956.14 1168.35,956.14 ; -1178.57,956.34 ccw(c-1186.06,1098.34) -1062.19,1028.51 1052.28,1028.51 ccw(c1176.15,1098.34) 1168.66,956.34

## Other copper
Top Layer:
  region net RED_LL: -615,-530 -615,-475 -670,-475 -670,-530
  region net GREEN_LL: -757.11,-527.11 -770,-540 -757.11,-552.89 -744.21,-540
  region net GREEN_LL: -735,-525 -760,-500 -785,-525 -760,-550
  region net GREEN_LL: -735,-525 -735,-480 -785,-480 -785,-525
  region net GND: -715,425 -715,565 -900,565 -900,425
  region net M3V3: 636,-11 600,25 564,-11 600,-47
  region net NetBZ1_1: -869.32,350 -857.16,362.16 -887.83,392.83 -899.99,380.67
  region net NetBZ1_1: -869.32,350 -842.16,377.16 -865,400 -892.16,372.84
  rectangle net V6V: -195,-225 -135,-195
  region net V6V: -185,-235 -177.5,-227.5 -197.5,-207.5 -205,-215
  rectangle net V6V: -185,-235 -145,-220
  region net V6V: -197.93,-212.07 -177.93,-192.07 -185,-185 -205,-205
  rectangle net V6V: -185,-195 -145,-185
  region net V6V: -142.07,-202.07 -135,-195 -145,-185 -152.07,-192.07
  region net V6V: -145,-235 -135,-225 -142.5,-217.5 -152.5,-227.5
  region net NetLED1_2: -597.5,522.5 -582.5,537.5 -615,570 -630,555
  region net NetLED1_2: -612.5,577.5 -582.5,607.5 -600,625 -630,595
  rectangle net NetLED1_2: -630,555 -585,595
  region net GND: 133.87,590 133.87,615 108.87,615 108.87,590
  region net GND: 90.77,650 90.77,690 60,690 60,650
  region net GND: 86.39,656.39 66.39,676.39 40,650 60,630
  region net GND: 85.33,641.55 73.46,653.42 55.02,634.98 66.89,623.11
  region net GND: 95.04,595 95.04,663.97 66.89,663.97 66.89,595
  region net GND: 158.37,485 158.37,508.37 135,508.37 135,485
  region net NetC62_1: 330,405 330,445 285,445 285,405
  region net GND: 340,-170.5 340,165 210,165 210,-170.5
  region net GND: 280,-238 280,-179.84 201.9,-179.84 201.9,-238
  region net VBAT: -135,-350 -150,-335 -150,-275 -140,-265 220,-265 230,-275 230,-320 150,-400 150,-575 140,-585 85,-585 75,-575 75,-375 50,-350
  pour cut-out: 245.04,609.41 245.04,484.41 220.04,484.41 220.04,609.41
Bottom Layer:
  region net NetLED1_2: -590,-775 -610,-755 -630,-775 -610,-795
  region net NetLED1_2: -570,-795 -570,-755 -610,-755 -610,-795
  region net GND: 20,525 20,595 -25,595 -25,525
  region net GND: 75,550 75,616.63 25,616.63 25,550
  region net GND: 175,465 175,520 105,520 105,465
  region net GND: 174.54,499.54 62.04,612.04 -25,525 87.5,412.5

## Silkscreen, mask and mechanical layers (free items; w line width, h text height)
Top Overlay:
  circle w10: c-1186.06,-649.61 r141.73
  circle w10: c-1186.06,728.35 r141.73
  circle w10: c1176.14,728.35 r141.73
  circle w10: c1176.14,-649.61 r141.73
  lines w3.94: -1029.96,-1015.59 1020.04,-1015.59 1020.04,1015 -1029.96,1015 -1029.96,-1015.59
  text "#" at -450,605 h30
  text "1" at -215,605 h30
  text "*" at -450,555 h30
  text "2" at -215,555 h30
  text "0" at -450,505 h30
  text "3" at -215,505 h30
  text "9" at -450,455 h30
  text "4" at -215,455 h30
  text "8" at -450,405 h30
  text "5" at -215,405 h30
  text "7" at -450,355 h30
  text "6" at -215,355 h30
  text "20-8-4 V1.0" at 1050,350 h30 r270
  text "JYD-YL203" at 1150,350 h60 r270
  text "+" at -779.96,184.41 h50 r45
  text "NRS" at 850,-375 h30 r180
  text "GND" at 850,-475 h30 r180
  text "CLK" at 850,-575 h30 r180
  text "G" at -740,-615 h30 r90
  text "R" at -685,-615 h30 r90
  text "V" at -630,-615 h30 r90
  text "DI" at 850,-675 h30 r180
  text "GND" at -170,-725 h40 r270
  text "TX" at -80,-725 h40 r270
  text "RX" at 15,-725 h40 r270
  text "BAT" at 95,-725 h40 r270
  text "3V3" at 850,-775 h30 r180
Bottom Overlay:
  circle w137.8: c590.55,248.03 r55.12
  circle w137.8: c0,744.09 r55.12
  circle w5: c-590.55,744.09 r137.8
  circle w5: c0,744.09 r137.8
  circle w5: c0,248.03 r137.8
  circle w5: c-590.55,248.03 r137.8
  circle w5: c0,-248.03 r137.8
  circle w5: c-590.55,-248.03 r137.8
  circle w5: c-590.55,-744.09 r137.8
  circle w5: c0,-744.09 r137.8
  circle w5: c590.55,-744.09 r137.8
  circle w5: c590.55,-248.03 r137.8
  circle w5: c590.55,248.03 r137.8
  circle w5: c590.55,744.09 r137.8
  circle w137.8: c-590.55,744.09 r55.12
  circle w137.8: c590.55,744.09 r55.12
  circle w137.8: c0,248.03 r55.12
  circle w137.8: c-590.55,248.03 r55.12
  circle w137.8: c-590.55,-248.03 r55.12
  circle w137.8: c0,-248.03 r55.12
  circle w137.8: c590.55,-248.03 r55.12
  circle w137.8: c590.55,-744.09 r55.12
  circle w137.8: c0,-744.09 r55.12
  circle w137.8: c-590.55,-744.09 r55.12
  lines w5: -722.83,-972.44 720.47,-972.44 ccw(c720.47,-858.27) 834.65,-858.27 834.65,858.27 ccw(c720.47,858.27) 720.47,972.44 -720.47,972.44 ccw(c-720.47,858.27) -834.65,858.27 -834.65,-858.27 ccw(c-720.47,-858.27) -720.47,-972.44 ; -846.48,-866.15 ccw(c-728.37,-866.15) -728.37,-984.26 728.33,-984.26 ccw(c728.33,-866.15) 846.44,-866.15 846.44,866.13 ccw(c728.33,866.13) 728.33,984.24 -728.37,984.24 ccw(c-728.37,866.13) -846.48,866.13 -846.48,-866.15
Mechanical 1:
  text "工艺要求:" at -1304.96,1509.41 h100
  text "1> 板材:FR-4" at -1304.96,1309.41 h50
  text "4> 阻焊:顶层绿油" at -679.96,1309.41 h50
  text "7> 板框: Keep-out 层" at -4.96,1309.41 h50
  text "2> 板厚:1.6   mm" at -1304.96,1209.41 h50
  text "5> 阻焊:底面绿油" at -679.96,1209.41 h50
  text "3> 过孔:盖油" at -1304.96,1109.41 h50
  text "6> 字符:白色双面" at -679.96,1109.41 h50

## Dimensions
-1294.33,-1065.59 to 1284.41,-1065.59 on Mechanical 1
-1104.96,1028.5 to -1319.96,-1048.27 on Mechanical 1